# Altium PCB FlightController_Top_6x6.PcbDoc (part 5 of 6)
Units mm, origin at the board's own origin, x right, y up, seen from the top; angles counter-clockwise.
Board outline 149.8 x 149.8 mm, 2 copper layers (Top Layer, Bottom Layer); 156 components, 166 nets, 860 pads, 423 vias.
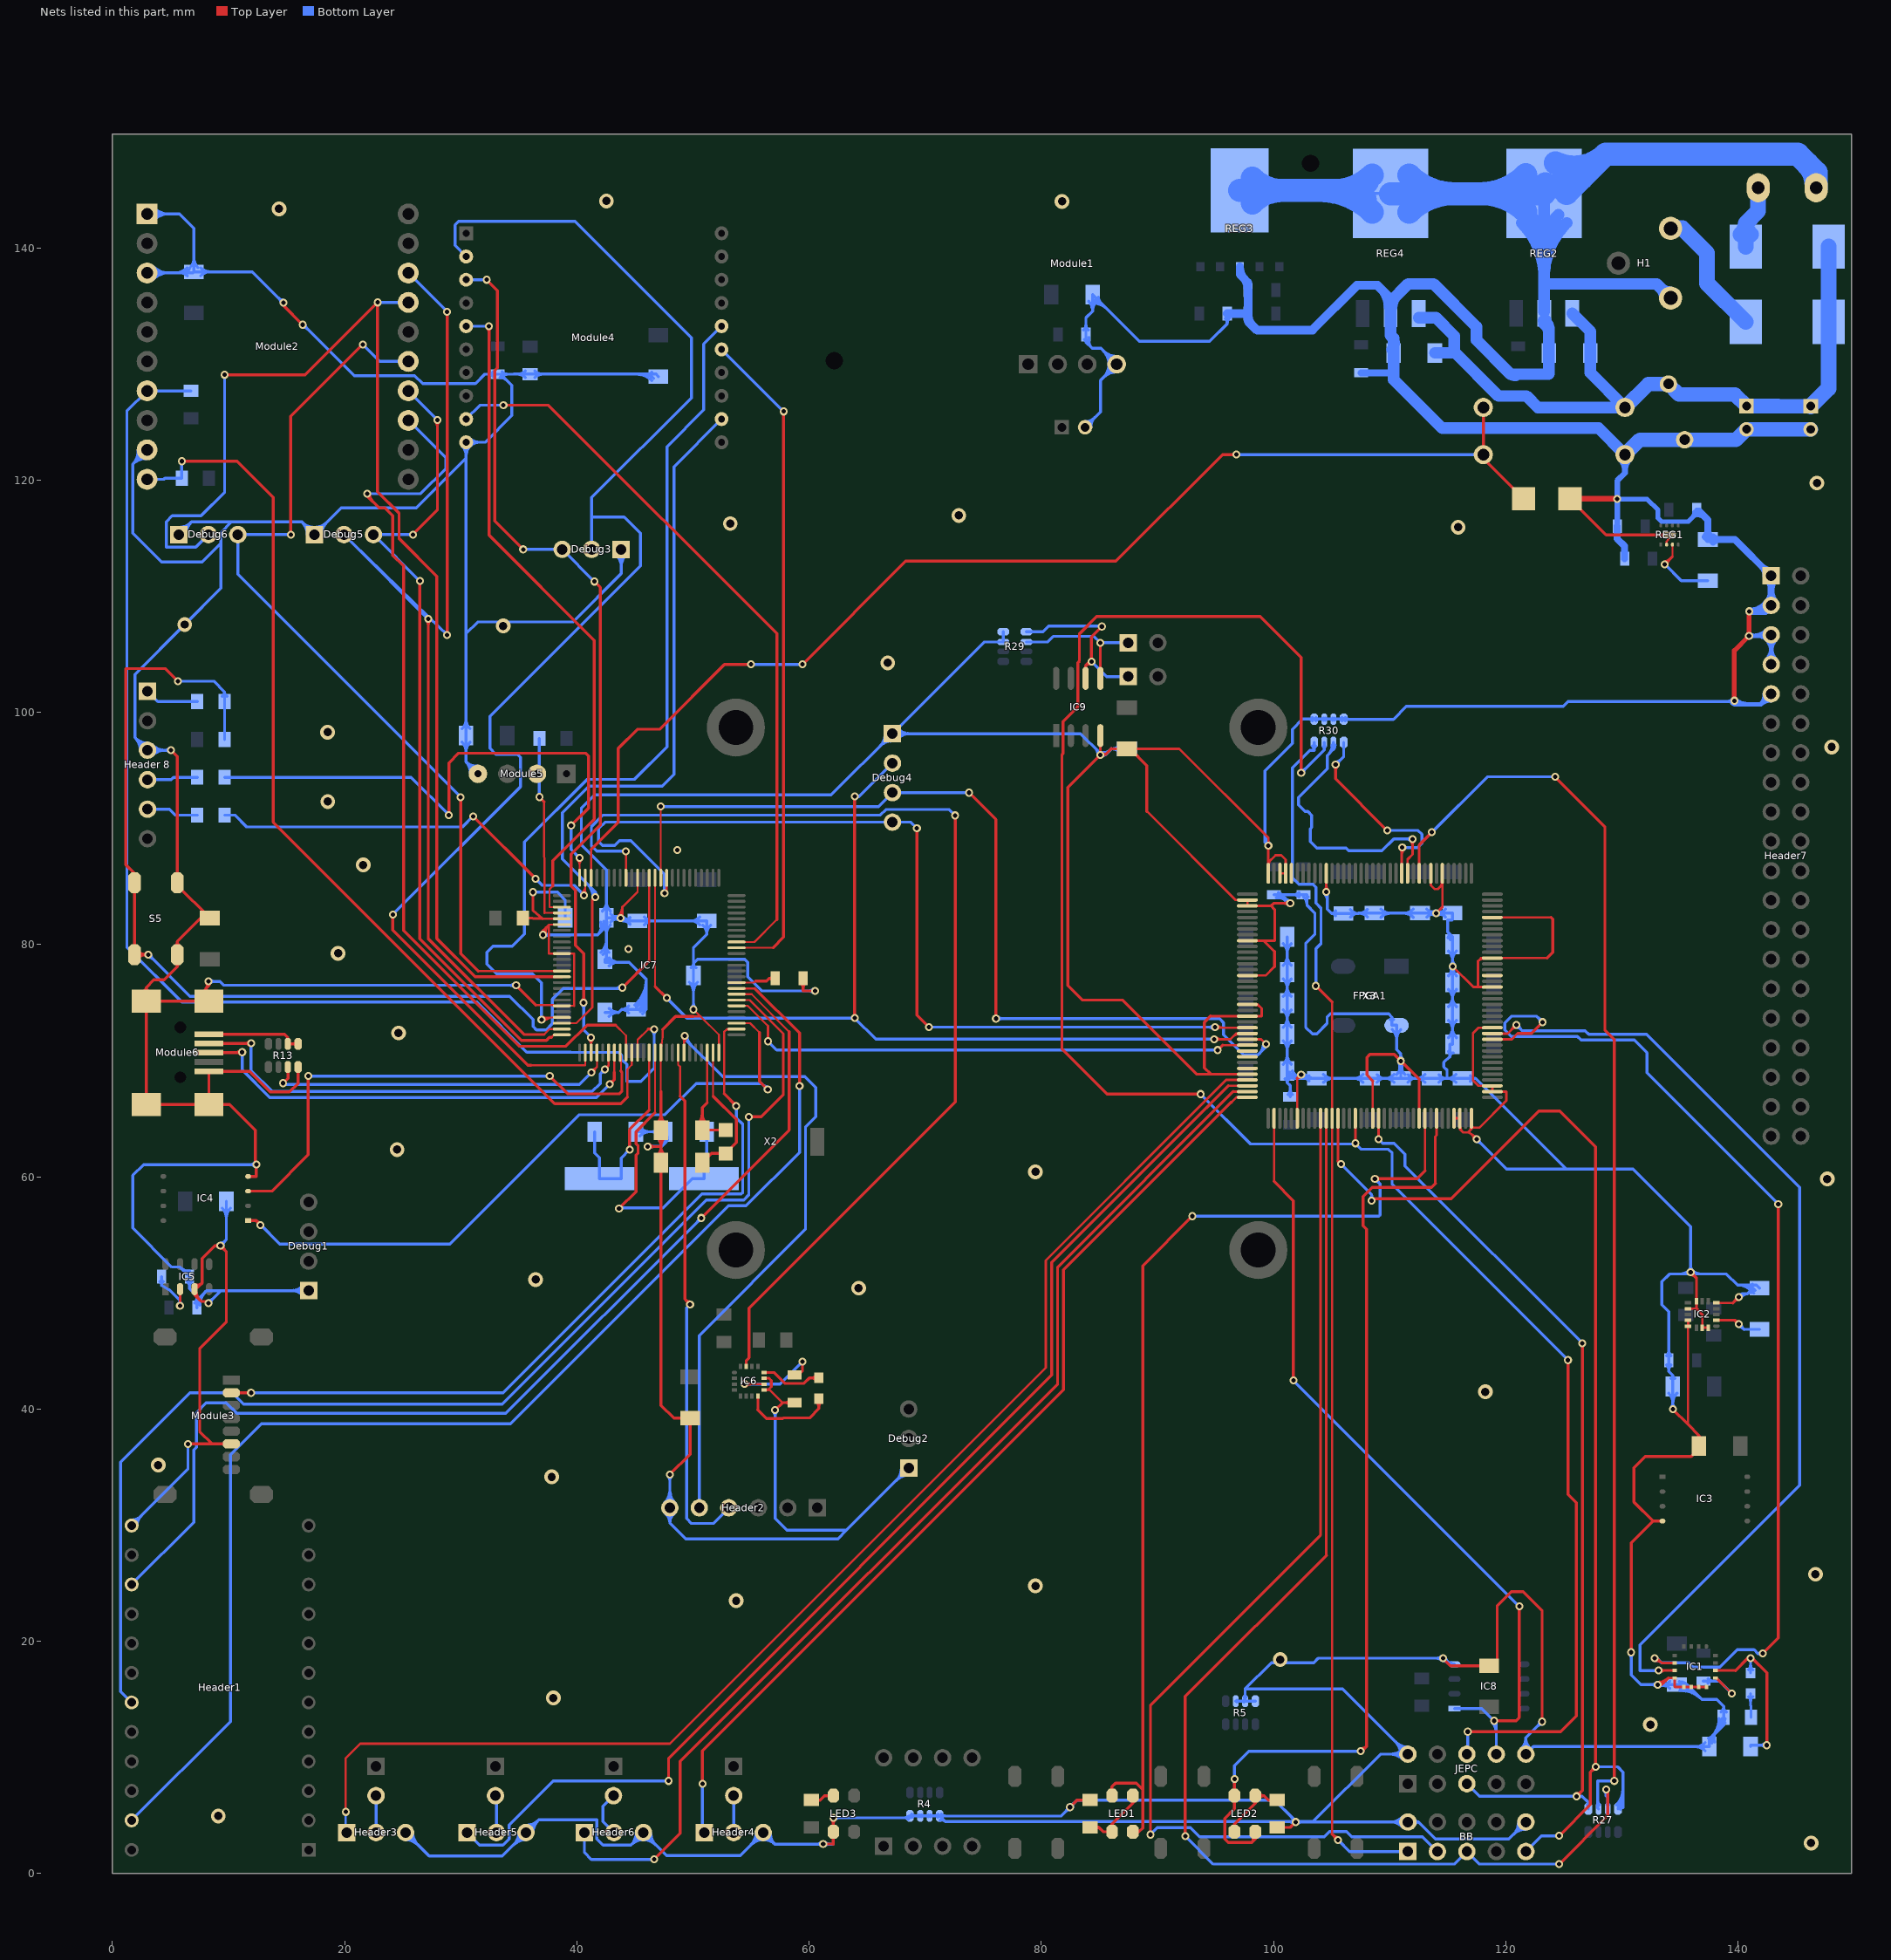
[diagram p5: the nets of this part, all layers, seen from the top]

## Via types
v1: diameter 0.686, hole 0.381, Top Layer to Bottom Layer, 391 vias
v2: diameter 1.27, hole 0.711, Top Layer to Bottom Layer, 32 vias

## Nets (pads, with @x,y where several pads share a name; then routed paths per layer and width w, separated by ;. In a path a pad name is that pad's centre, name@x,y a point inside that pad or via, vN(x,y) a via of type N, cw(c..) or ccw(c..) an arc to the next point about the centre after c; other vN are vias at no path point) (continued)
GND: (continued)
  Bottom Layer w0.4: v1(129.61,118.394) 129.61,118.364 132.198,118.364 133.117,117.445 133.117,116.745 133.432,116.429 135.733,116.429 C44.2@136.652,117.348 ; v1@129.711,118.495 ccw(c130.028,118.812) 130.028,118.364 ; 136.053,116.749 ccw(c135.565,117.237) C44.2@136.255,117.237 ; C44.2@136.455,117.221 C44.2@136.455,117.437 ; C40.1@137.414,114.894 C40.1@137.414,115.443 ; v1@139.514,100.829 ccw(c139.842,101.158) 139.842,100.694 ; v1@139.725,100.94 139.971,100.694 141.969,100.694 ; v1@139.797,101.112 ccw(c140.807,102.123) 140.807,100.694 ; v1(140.965,106.599) Header7.5@142.794,106.599 ; v1@141.067,106.498 cw(c141.311,106.254) 141.311,106.599 cw(c141.311,106.944) v1@141.067,106.7 ; 141.352,106.599 ccw(c141.352,108.203) Header7.5@142.486,107.069 ; 141.742,106.599 cw(c141.742,105.547) 142.486,106.291 cw(c141.547,105.352) 142.875,105.352 cw(c144.203,105.352) Header7.5@143.264,106.291 ; Header7.9@142.325,101.586 cw(c141.107,101.555) 141.969,100.694 ; Header7.7@142.486,104.529 ccw(c141.547,105.468) 142.875,105.468 ccw(c144.203,105.468) Header7.7@143.264,104.529 ; Header7.9@142.861,101.05 ccw(c142.83,99.832) 141.969,100.694 ; Header7.9@142.875,101.6 141.969,100.694 ; Header7.7@142.875,104.14 Header7.5@142.875,106.68
  Bottom Layer w0.5: C42.2@129.61,116.04 v1@129.61,118.364 ; v1(129.61,118.394) 129.61,119.958 130.276,120.624 R20.1@130.276,122.204 ; R20.1@129.869,121.797 cw(c128.888,120.816) 130.276,120.816 cw(c131.664,120.816) R20.1@130.683,121.797
  Bottom Layer w0.6: C47.2@107.549,129.259 110.346,129.259 ; C42.2@129.61,116.04 129.61,114.956 130.245,114.321 C39.2@130.245,113.246 ; C44.2@136.455,117.137 cw(c136.455,116.152) 137.152,116.848 ; C44.2@136.652,117.348 137.414,116.586 C40.1@137.414,115.443 ; C40.1@137.184,115.124 ccw(c136.629,115.679) 137.414,115.679 ccw(c138.199,115.679) C40.1@137.644,115.124 ; C40.1@137.414,114.894 139.741,114.894 Header7.1@142.875,111.76 Header7.3@142.875,109.22 142.367,108.712 v1(140.97,108.712) ccw(c140.97,110.635) Header7.3@142.514,109.488 ; C40.1@137.869,114.664 cw(c138.424,114.109) 138.424,114.894 cw(c138.424,115.679) C40.1@137.869,115.124 ; 142.163,108.712 ccw(c142.163,109.749) Header7.3@142.995,109.131 ; Header7.1@142.425,111.76 ccw(c141.339,111.76) 142.107,112.528 ccw(c142.875,113.296) Header7.1@142.875,112.21 ; Header7.3@142.557,109.538 ccw(c141.789,110.306) 142.875,110.306 ccw(c143.961,110.306) Header7.3@143.193,109.538 ; Header7.1@142.557,111.442 cw(c141.789,110.674) 142.875,110.674 cw(c143.961,110.674) Header7.1@143.193,111.442
  Bottom Layer w0.7: REG3.3@97.104,138.35 ccw(c98.593,138.35) 97.54,137.297 ; REG3.3@97.104,138.4 97.104,137.733 97.809,137.028 C45.2@97.809,136.368 ; 97.398,137.439 cw(c96.527,136.568) C45.2@97.759,136.568
  Bottom Layer w0.75: C46.2@96.018,134.336 C48.2@97.809,134.336 ; C45.2@97.809,136.368 C48.2@97.809,134.336 ; C48.2@97.834,134.136 ccw(c98.945,134.136) 98.159,133.351 ; 103.35,132.941 107.188,136.779 108.966,136.779 110.089,135.656 ; 103.378,132.914 98.596,132.914 97.809,133.701 C48.2@97.809,134.336 ; 109.182,136.563 cw(c107.525,134.905) REG4.2@109.869,134.905
  Bottom Layer w1: 110.089,135.656 REG4.2@110.089,135.392 ; REG4.2@110.184,134.905 cw(c111.589,134.905) 110.596,135.899 ; C49.1@110.239,131.256 ccw(c109.381,131.773) 110.089,132.481 ; 120.284,129.271 ccw(c120.861,129.848) C41.2@120.861,129.032 ; REG2.2@121.372,142.162 cw(c116.676,137.465) 123.317,137.465 cw(c129.959,137.465) REG2.2@125.262,142.162 ; REG2.2@122.079,142.869 cw(c119.09,139.88) 123.317,139.88 cw(c127.544,139.88) REG2.2@124.555,142.869 ; REG2.2@123.25,133.744 cw(c122.088,132.582) 123.731,132.582 ; REG2.2@123.272,133.727 cw(c122.854,132.956) 123.731,132.956 ; REG2.2@123.317,133.477 123.731,133.063 C43.2@123.731,130.967 123.731,129.165 ; REG2.2@123.317,134.514 REG2.2@123.317,144.674 ; REG2.2@123.412,133.811 ccw(c124.448,133.811) 123.715,133.079 ; 123.698,129.132 C41.2@121.061,129.132 120.423,129.132 117.475,132.08 117.475,133.223 113.792,136.906 111.603,136.906 REG4.2@110.089,135.392 ; 123.825,136.906 132.994,136.906 H1.OUT@134.209,135.691 ; R20.1@130.276,122.204 127.999,124.481 114.533,124.481 110.346,128.668 110.346,129.259 C49.1@110.346,130.967 110.346,132.224 110.089,132.481 ; H1.OUT@133.709,135.691 ccw(c132.502,135.691) 133.355,136.545 ccw(c134.209,137.398) H1.OUT@134.209,136.191 ; 110.089,132.481 REG4.2@110.089,134.35 REG4.2@110.089,135.392
  Bottom Layer w1.25: R20.1@130.276,122.204 131.559,123.487 C38.1@135.417,123.487 139.845,123.487 C36.2@140.744,124.386 143.48,124.386 ; 143.487,124.379 C37.2@146.274,124.379
  Bottom Layer w2: REG3.3@97.104,144.953 106.817,144.953 ; REG3.3@98.165,143.894 cw(c100.721,141.338) 100.721,144.953 ; REG3.3@98.165,146.016 ccw(c100.73,148.581) 100.73,144.953 ; 104.014,144.953 cw(c104.014,138.613) REG4.2@108.497,143.096 ; 105.295,144.953 ccw(c105.295,149.482) REG4.2@108.497,146.28 ; REG4.2@107.914,144.11 ccw(c106.817,143.818) 106.817,144.953 ; REG4.2@108.092,145.727 cw(c106.817,146.391) 106.817,144.953 ; REG4.2@110.089,144.674 REG2.2@123.317,144.674 ; REG4.2@111.681,143.096 cw(c115.489,139.288) 115.489,144.674 ; REG4.2@111.681,146.28 ccw(c115.558,150.157) 115.558,144.674 ; 117.81,144.674 ccw(c117.81,150.211) REG2.2@121.725,146.296 ; 117.955,144.674 cw(c117.955,139.342) REG2.2@121.725,143.112 ; REG2.2@123.425,145.528 ccw(c124.631,148.064) 126.617,146.078 ; REG2.2@124.284,147.334 ccw(c125.922,150.78) 128.621,148.082 ; REG2.2@125.243,144.704 128.621,148.082 ; 145.999,147.235 cw(c144.205,145.441) Header9.R@146.742,145.441 ; Header9.R@146.742,145.191 146.742,146.492 145.152,148.082 128.621,148.082
  other v1: 44.45,79.629 48.641,88.138
  other v2: 146.304,2.629 9.113,4.953 132.46,12.827 37.973,15.113 100.584,18.415 53.721,23.495 79.502,24.765 146.685,25.774 37.831,34.163 3.937,35.179 118.245,41.485 64.262,50.419 36.449,51.157 147.701,59.817 79.502,60.43 24.511,62.357 24.638,72.39 19.431,79.248 21.59,86.868 18.542,92.329 148.082,97.028 18.527,98.298 66.777,104.267 33.655,107.442 115.904,115.951 53.213,116.267 72.898,116.967 146.812,119.761 14.351,143.383 81.788,144.018 42.545,144.056
GPS_PPS: IC7.59 Module2.13 | length 79.1
  Top Layer w0.17: IC7.59@44.229,70.707 44.229,72.17
  Top Layer w0.175: 43.322,73.077 44.229,72.17
  Top Layer w0.254: v1(21.941,118.842) 21.941,118.639 22.957,117.623 23.465,117.623 24.151,116.937 24.151,113.533 25.065,112.619 25.065,81.202 35.02,71.247 39.065,71.247 40.895,73.077 43.322,73.077 ; v1@22.157,118.842 ccw(c23.169,118.842) 22.453,118.126
  Bottom Layer w0.254: v1(21.941,118.842) 26.551,118.842 28.71,121.001 28.71,121.926 Module2.13@25.481,125.155
GPS_RXA: Debug6.3 IC7.39 Module2.15 | length 81.4
  Top Layer w0.17: 31.489,77.731 IC7.39@38.704,77.731
  Top Layer w0.254: v1(15.362,115.316) 15.362,125.497 v1(21.56,131.694) ; v1(29.993,92.705) 29.993,79.227 31.489,77.731
  Bottom Layer w0.254: v1(15.362,115.316) Debug6.3@10.795,115.316 10.795,111.903 v1(29.993,92.705) ; v1(21.56,131.694) 23.019,130.235 Module2.15@25.481,130.235
GPS_RXB: Debug5.3 IC7.50 Module2.14 | length 71.2
  Top Layer w0.17: 37.804,72.017 38.019,72.231 IC7.50@38.704,72.231 ; 37.926,72.138 cw(c38.054,72.009) IC7.50@38.054,72.191
  Top Layer w0.254: v1(25.883,115.316) 27.986,117.42 v1(27.986,125.19) ; v1(26.475,111.32) 26.475,80.511 35.231,71.755 37.379,71.755 37.641,72.017 37.804,72.017 ; v1@27.833,125.037 cw(c27.465,124.668) 27.986,124.668 cw(c28.508,124.668) v1@28.139,125.037
  Bottom Layer w0.254: Module2.14@25.481,127.695 v1(27.986,125.19) ; v1(25.883,115.316) Debug5.3@22.479,115.316 v1(26.475,111.32)
GPS_TXA: Debug6.2 IC7.40 Module2.17 | length 120.1
  Top Layer w0.254: v1(9.647,129.078) 16.593,129.078 v1(22.83,135.315) 22.83,119.005 24.684,117.151 24.684,114.981 27.935,111.73 27.935,80.523 31.235,77.223 32.837,77.223 32.845,77.232 IC7.40@38.704,77.232
  Bottom Layer w0.254: Debug6.2@8.255,115.316 7.178,114.239 4.638,114.239 4.638,116.429 5.146,116.937 7.628,116.937 9.66,118.969 ; v1(22.83,135.315) Module2.17@25.481,135.315 ; 9.66,118.969 9.66,129.116 9.66,118.969
GPS_TXB: Debug5.2 IC7.49 Module2.18 | length 99.8
  Top Layer w0.17: 37.637,72.732 IC7.49@38.704,72.732
  Top Layer w0.175: 37.168,72.263 37.637,72.732
  Top Layer w0.254: v1@27.046,107.903 cw(c26.677,107.535) 27.199,107.535 cw(c27.72,107.535) v1@27.352,107.903 ; v1(27.199,108.056) 27.199,80.506 35.441,72.263 37.168,72.263 ; v1(28.824,106.675) v1(28.824,134.512)
  Bottom Layer w0.254: Debug5.2@19.939,115.316 20.65,114.605 ; Module2.18@25.481,137.855 v1(28.824,134.512) ; v1(27.199,108.056) 20.65,114.605 ; 20.65,114.605 v1@27.297,108.157 ; v1@27.297,108.157 v1(28.824,106.675) v1@27.297,108.157
GPS_XRST: IC7.61 Module2.7 R8.2 | length 111.2
  Top Layer w0.17: IC7.61@45.229,70.707 45.229,71.798
  Top Layer w0.175: 45.229,71.798 46.147,72.716
  Top Layer w0.254: 46.147,72.716 v1(46.655,72.716)
  Bottom Layer w0.254: R8.2@6.761,127.697 4.849,127.697 4.847,127.695 Module2.7@2.981,127.695 1.24,125.954 1.24,79.786 5.975,75.051 31.375,75.051 35.687,70.739 39.462,70.739 39.479,70.722 43.607,70.722 43.874,70.455 43.874,70.112 44.305,69.681 44.305,68.232 45.525,68.232 46.655,69.363 v1(46.655,72.716) ; v1@46.502,72.563 cw(c46.134,72.194) 46.655,72.194 cw(c47.177,72.194) v1@46.808,72.563
GPS_XSTBY: IC7.60 Module2.10 R9.2 | length 86.4
  Top Layer w0.17: 44.729,69.641 IC7.60@44.729,70.707
  Top Layer w0.175: 44.345,66.862 44.345,69.256 44.729,69.641
  Top Layer w0.254: v1(5.967,121.636) 10.74,121.636 13.843,118.533 13.843,90.551 38.092,66.302 43.785,66.302 44.345,66.862
  Bottom Layer w0.254: Module2.10@2.981,120.075 4.415,120.075 4.512,120.172 R9.2@5.967,120.172 v1(5.967,121.636)
GYRO_DRDY: FPGA1.47 IC1.6 | length 94.5
  Top Layer w0.21: FPGA1.47@118.852,71.844 120.526,71.844 121.041,72.359 ; v1(132.842,18.542) 133.036,18.542 133.445,18.133 ; v1@132.847,18.514 cw(c132.911,18.165) 133.162,18.416 ; v1@132.885,18.308 cw(c132.998,17.686) 133.445,18.133 ; IC1.6@134.562,18.133 133.445,18.133
  Top Layer w0.254: 121.041,72.359 122.219,72.359 v1(123.185,73.325) ; v1(142.134,18.944) 143.48,20.29 v1(143.48,57.653)
  Bottom Layer w0.254: v1@122.969,73.325 ccw(c122.448,73.325) 122.817,73.694 ccw(c123.185,74.063) v1@123.185,73.541 ; v1(123.185,73.325) 122.677,73.833 120.493,73.833 119.919,73.259 119.919,72.655 120.493,72.081 126.183,72.081 126.486,71.777 131.084,71.777 132.177,70.684 132.177,68.956 v1(143.48,57.653) ; v1(132.842,18.542) 133.043,18.542 133.424,18.161 ; v1@132.881,18.33 cw(c132.993,17.729) 133.424,18.161 ; v1@141.957,18.82 ccw(c141.719,18.654) 141.719,18.944 ; v1@141.957,19.068 cw(c141.719,19.234) 141.719,18.944 ; v1(142.134,18.944) 141.719,18.944 ; 133.424,18.161 135.763,18.161 136.144,17.78 138.455,17.78 139.941,19.266 141.397,19.266 141.719,18.944
GYRO_INT1: FPGA1.48 IC1.7 | length 85.5
  Top Layer w0.21: FPGA1.48@118.852,72.344 120.172,72.344 v1(120.925,73.097) ; v1@120.687,73.097 cw(c120.112,73.097) 120.518,72.69 cw(c120.925,72.284) v1@120.925,72.859 ; v1(133.168,17.483) IC1.7@134.562,17.483 ; v1@133.336,17.315 cw(c133.742,16.908) 133.742,17.483 cw(c133.742,18.058) v1@133.336,17.651
  Bottom Layer w0.254: v1@120.925,72.881 cw(c120.925,72.359) 121.293,72.728 cw(c121.662,73.097) v1@121.141,73.097 ; v1(120.925,73.097) 121.433,72.589 126.855,72.589 127.159,72.285 132.139,72.285 145.334,59.089 145.334,33.439 131.572,19.677 131.572,17.483 v1(133.168,17.483)
HUMIDITY_I/O: IC7.29 Module5.2 R10.1 | length 16.9
  Top Layer w0.17: 37.206,82.731 IC7.29@38.704,82.731
  Top Layer w0.175: 37.181,92.299 37.206,82.731
  Top Layer w0.254: v1(36.768,92.712) 37.181,92.299
  Bottom Layer w0.254: v1(36.768,92.712) 36.768,94.5 Module5.2@36.556,94.712 36.768,94.924 R10.1@36.768,97.76
IC9_10K_C: IC9.5 J5.1 R29.6 | length 12.3
  Top Layer w0.254: IC9.5@85.09,102.934 v1(85.09,106.005)
  Bottom Layer w0.254: R29.6@78.724,106.064 80.537,106.064 81.026,106.553 84.542,106.553 v1(85.09,106.005) J5.1@87.503,106.005
IC9_10K_D: IC9.6 J6.1 R29.5 | length 16.1
  Top Layer w0.254: IC9.6@83.82,102.934 83.82,104.038 ; v1@84.281,104.178 ccw(c84.18,103.678) 83.82,104.038 ; v1(85.217,107.402) 84.323,106.508 v1(84.323,104.389) 84.171,104.389 83.82,104.038
  Bottom Layer w0.254: R29.5@78.724,106.939 80.142,106.939 80.645,107.442 v1@85.217,107.442 ; v1(84.323,104.389) 85.629,103.084 J6.1@87.503,103.084
ICSP_MCLR: "Header 8.1" R18.2 | length 4.7
  Bottom Layer w0.254: 3.018,101.824 3.907,100.935 R18.2@7.304,100.935
ICSP_PGC: IC7.24 R15.2 | length 37.6
  Top Layer w0.17: v1@40.428,84.43 ccw(c39.699,85.158) IC7.24@40.729,85.158 ; v1@40.548,84.309 ccw(c40.109,84.748) 40.729,84.748 ; v1@40.729,84.367 IC7.24@40.729,85.756 ; 40.729,84.582 ccw(c40.945,84.582) v1@40.792,84.43
  Top Layer w0.175: v1(40.61,84.247) v1@40.729,84.367
  Top Layer w0.254: v1(31.06,91.054) v1(36.444,85.67)
  Bottom Layer w0.254: R15.2@9.654,91.156 10.536,91.156 11.552,90.14 30.145,90.14 v1(31.06,91.054) ; v1(36.444,85.67) 37.008,85.106 39.752,85.106 v1(40.61,84.247)
ICSP_PGD: IC7.25 R14.2 | length 50
  Top Layer w0.17: v1@40.047,87.291 cw(c39.606,86.85) 40.229,86.85 cw(c40.852,86.85) v1@40.412,87.291 ; IC7.25@40.229,85.756 v1(40.229,87.473)
  Top Layer w0.254: v1(28.977,91.156) 28.977,95.652 29.815,96.49 40.737,96.49 40.991,96.236 40.991,91.755 v1(39.503,90.267)
  Bottom Layer w0.254: R14.2@9.654,94.416 25.717,94.416 v1(28.977,91.156) ; v1(39.503,90.267) 39.503,88.199 v1(40.229,87.473)
MAGNET_DRDY: IC6.15 IC7.17 | length 94.2
  Top Layer w0.17: IC7.17@44.229,85.756 v1(44.229,88.044)
  Top Layer w0.21: IC6.15@54.589,43.675 54.589,44.175
  Top Layer w0.254: 54.589,44.175 54.834,44.42 54.834,48.696 72.589,66.451 v1(72.589,91.131)
  Bottom Layer w0.254: v1(44.229,88.044) 41.724,88.044 41.245,88.523 41.245,90.14 42.261,91.156 66.137,91.156 66.62,91.639 72.081,91.639 v1(72.589,91.131)
MCLR: IC7.13 R17.1 R18.1 S5.2 | length 101.6
  Top Layer w0.17: 46.229,78.609 IC7.13@46.229,85.756
  Top Layer w0.254: S5.2@2.187,78.845 cw(c2.909,78.123) 2.909,79.144 cw(c2.909,80.165) S5.2@2.187,79.443 ; v1@2.944,78.991 ccw(c2.575,78.623) 2.575,79.144 ccw(c2.575,79.666) v1@2.944,79.297 ; v1(3.096,79.144) S5.2@1.888,79.144 S5.2@1.888,85.344 1.888,86.123 1.138,86.873 1.138,103.78 4.542,103.78 v1(5.634,102.688) ; v1(43.918,76.297) 46.229,78.609
  Bottom Layer w0.254: v1@3.096,78.928 cw(c3.096,78.407) 3.465,78.775 cw(c3.834,79.144) v1@3.312,79.144 ; v1(3.096,79.144) 6.681,75.559 34.21,75.559 36.228,73.541 36.228,72.944 36.516,72.656 37.35,72.656 37.892,73.198 37.892,75.301 38.825,76.234 43.854,76.234 v1(43.918,76.297) ; v1(5.634,102.688) 8.733,102.688 9.654,101.767 ; R18.1@9.448,101.4 ccw(c9.226,101.767) 9.654,101.767 ; R17.1@9.654,97.675 R18.1@9.654,100.935 9.654,101.767 ; R18.1@9.86,101.4 cw(c10.082,101.767) 9.654,101.767 ; 43.243,76.234 ccw(c43.243,76.972) v1@43.765,76.45 ; 43.549,76.234 cw(c43.549,75.929) v1@43.765,76.144
MOTOR_W1: FPGA1.141 Header3.1 | length 113.8
  Top Layer w0.21: v1(20.087,5.304) 20.087,9.927 21.336,11.176 47.997,11.176 80.391,43.57 80.391,52.808 94.008,66.426 94.012,66.426 94.423,66.837 94.423,66.841 95.913,68.33 ; 95.913,68.344 FPGA1.141@97.752,68.344 FPGA1.141@97.716,68.308
  Bottom Layer w0.21: v1(20.087,5.304) 20.087,3.602 Header3.1@20.163,3.526
MOTOR_W2: FPGA1.142 Header5.1 | length 102.3
  Top Layer w0.21: 96.114,67.844 FPGA1.142@97.752,67.844
  Top Layer w0.254: v1(47.9,7.971) 47.9,9.927 80.899,42.926 80.899,52.629 94.21,65.94 94.213,65.94 94.909,66.636 94.909,66.639 96.114,67.844
  Bottom Layer w0.254: Header5.1@30.535,3.526 31.627,2.434 33.625,2.434 34.158,2.967 34.158,4.161 37.968,7.971 v1(47.9,7.971)
MOTOR_W3: FPGA1.143 Header6.1 | length 96
  Top Layer w0.21: 96.541,67.344 FPGA1.143@97.752,67.344
  Top Layer w0.254: v1(46.655,1.215) 48.895,3.454 48.895,9.652 81.407,42.164 81.407,52.21 96.541,67.344
  Bottom Layer w0.254: Header6.1@40.652,3.526 40.652,1.807 41.245,1.215 v1(46.655,1.215)
MOTOR_W4: FPGA1.144 Header4.1 | length 82.8
  Top Layer w0.2: 96.393,66.421 96.816,66.844 FPGA1.144@97.409,66.844
  Top Layer w0.254: v1(50.821,7.717) 50.821,10.562 81.915,41.656 81.915,52 96.336,66.421 96.393,66.421
  Bottom Layer w0.254: Header4.1@50.821,3.675 v1(50.821,7.717)
MSEL0: FPGA1.85 R30.1 | length 20.3
  Top Layer w0.21: v1@110.927,88.194 cw(c110.624,87.891) 111.052,87.891 ; FPGA1.85@111.052,86.144 v1@111.052,88.319 ; 111.052,87.683 cw(c111.774,87.683) v1@111.263,88.194
  Top Layer w0.254: v1@105.202,95.362 cw(c104.833,94.994) 105.355,94.994 cw(c105.876,94.994) v1@105.507,95.362 ; v1(105.355,95.515) 105.355,94.28 v1(109.8,89.835) ; v1@111.052,88.319 v1(111.095,88.362)
  Bottom Layer w0.254: v1(105.355,95.515) 106.05,96.211 R30.1@106.05,97.425 ; v1@105.355,95.731 ccw(c105.355,96.253) 105.723,95.884 ccw(c106.092,95.515) v1@105.571,95.515 ; v1(109.8,89.835) 112.467,89.835 112.797,89.505 112.797,88.743 112.416,88.362 v1(111.095,88.362)
MSEL1: FPGA1.84 R30.2 | length 26.6
  Top Layer w0.21: FPGA1.84@111.552,86.144 111.552,87.34 111.978,87.766 v1(111.978,89.099) ; v1@111.81,88.93 cw(c111.403,88.524) 111.978,88.524 cw(c112.553,88.524) v1@112.146,88.93
  Bottom Layer w0.254: 104.722,96.378 ccw(c103.925,97.175) R30.2@105.052,97.175 ; R30.2@105.088,97.088 cw(c104.878,96.878) 105.175,96.878 cw(c105.472,96.878) R30.2@105.262,97.088 ; 105.155,96.812 ccw(c104.792,97.175) R30.2@105.306,97.175 ; R30.2@105.175,97.425 105.175,96.831 104.631,96.287 104.631,95.156 102.154,92.68 102.154,92.02 102.713,91.461 102.967,91.461 103.297,91.131 103.297,90.102 103.17,89.975 103.17,88.87 103.729,88.311 106.244,88.311 106.472,88.083 109.35,88.083 110.366,89.099 v1(111.978,89.099) ; v1@111.825,88.946 ccw(c111.456,88.577) 111.456,89.099 ccw(c111.456,89.62) v1@111.825,89.251
NCE: FPGA1.16 JEPC.6 R30.3 | length 182.6
  Top Layer w0.21: v1(107.052,62.89) 107.052,63.703 ; FPGA1.16@107.052,65.044 107.052,63.703 ; 107.056,63.699 107.052,63.703
  Top Layer w0.254: v1(93.721,67.128) 85.67,67.128 81.783,71.014 81.783,96.376 81.885,96.477 81.885,99.208 83.155,100.478 83.155,104.288 83.282,104.415 83.282,106.777 84.781,108.276 98.852,108.276 102.383,104.745 v1(102.383,94.79) ; v1(116.734,12.213) 124.735,12.213 126.094,13.572 126.094,31.936 125.37,32.66 v1(125.37,44.217)
  Bottom Layer w0.254: v1(93.721,67.128) 98.017,62.832 ; v1(102.383,94.79) 104.375,96.782 R30.3@104.375,97.425 ; v1@102.383,95.006 ccw(c102.383,95.527) 102.752,95.159 ccw(c103.12,94.79) v1@102.599,94.79 ; R30.3@104.288,97.088 cw(c104.078,96.878) 104.375,96.878 cw(c104.672,96.878) R30.3@104.462,97.088 ; v1(107.052,62.89) 107.564,62.378 109.914,62.378 110.219,62.073 110.219,59.368 v1(125.37,44.217) ; JEPC.6@116.659,10.274 116.734,10.35 v1(116.734,12.213) ; 98.017,62.832 107.052,62.832 98.017,62.832
NCONFIG: FPGA1.20 JEPC.5 R27.1 | length 80.2
  Top Layer w0.21: v1(109.052,63.233) FPGA1.20@109.052,65.044
  Top Layer w0.254: v1(126.106,6.65) 126.602,7.146 v1(126.602,45.669) ; v1@126.106,6.866 ccw(c126.106,7.388) 126.475,7.019 ccw(c126.844,6.65) v1@126.322,6.65
  Bottom Layer w0.254: v1(109.052,63.233) 109.392,62.892 110.391,62.892 111.328,61.955 111.328,60.943 v1(126.602,45.669) ; JEPC.5@116.659,7.734 117.743,6.65 v1(126.106,6.65) 126.589,6.65 ; v1@126.267,6.506 cw(c126.589,6.219) 126.589,6.65 ; v1@126.267,6.794 ccw(c126.589,7.081) 126.589,6.65 ; R27.1@127.012,5.912 ccw(c126.875,6.117) 127.122,6.117 ; R27.1@127.122,5.572 127.122,6.117 ; R27.1@127.232,5.912 cw(c127.369,6.117) 127.122,6.117 ; 126.589,6.65 127.122,6.117
NCSO: FPGA1.2 IC8.1 JEPC.8 | length 70.9
  Top Layer w0.21: 100.052,59.609 FPGA1.2@100.052,65.044
  Top Layer w0.254: 100.052,59.609 101.722,57.939 v1(101.722,42.464) ; v1(118.994,13.153) 120.899,13.153 121.179,13.432 v1(121.179,23.008)
  Bottom Layer w0.254: v1(101.722,42.464) v1(121.179,23.008) ; IC8.1@115.589,14.211 117.936,14.211 v1(118.994,13.153) 119.199,12.948 JEPC.8@119.199,10.274 ; v1@118.842,13 cw(c117.98,12.138) 119.199,12.138 ; v1@119.021,13.179 cw(c118.593,12.751) 119.199,12.751
NetC1_2: C1.2 IC1.13 | length 5.9
  Top Layer w0.21: IC1.13@138.062,16.833 138.149,16.833 v1(139.492,15.489)
  Bottom Layer w0.254: C1.2@137.033,16.58 138.402,16.58 v1(139.492,15.489) ; C1.2@137.426,16.387 cw(c137.892,15.921) 137.892,16.58 cw(c137.892,17.239) C1.2@137.426,16.773
NetC5_2: C5.2 IC2.2 | length 5.6
  Top Layer w0.21: IC2.2@138.153,47.644 139.748,47.644
  Top Layer w0.254: v1@139.866,47.327 ccw(c139.461,47.357) 139.748,47.644 ; v1@140.065,47.526 cw(c140.035,47.931) 139.748,47.644 ; v1(140.081,47.311) 139.748,47.644
  Bottom Layer w0.254: v1@140.081,47.095 cw(c140.081,46.574) 140.45,46.942 cw(c140.818,47.311) v1@140.297,47.311 ; v1(140.081,47.311) 140.534,46.858 140.541,46.866 C5.2@141.859,46.866
NetC6_1: C6.1 C7.1 IC1.14 | length 18.5
  Top Layer w0.21: IC1.14@138.062,17.483 139.797,17.483
  Top Layer w0.254: 139.797,17.483 140.856,18.542 141.224,18.542 142.494,17.272 v1(142.494,11.049)
  Bottom Layer w0.254: C6.1@140.904,17.526 ccw(c140.438,17.992) 141.097,17.992 ccw(c141.756,17.992) C6.1@141.29,17.526 ; C7.1@141.094,10.922 C7.1@141.094,11.049 ; C6.1@141.097,17.283 141.097,18.203 141.092,18.207 141.097,18.212 v1(141.097,18.542) ; C7.1@141.094,11.049 v1(142.494,11.049) C7.1@141.094,11.049 ; 141.973,11.049 ccw(c141.973,11.57) 142.341,11.202 cw(c141.973,11.57) 141.973,11.049 ; 141.973,11.049 cw(c141.973,10.528) 142.341,10.896 ccw(c141.973,10.528) 141.973,11.049
NetC6_2: C6.2 R3.1 | length 3.1
  Bottom Layer w0.254: C6.2@140.904,15.24 cw(c140.438,14.774) 141.097,14.774 cw(c141.756,14.774) C6.2@141.29,15.24 ; C6.2@141.097,15.483 141.097,14.48 141.129,14.448 R3.1@141.129,13.462
NetC16_1: C16.1 IC5.2 | length 6.2
  Top Layer w0.254: v1(5.812,48.89) 5.822,48.9 IC5.2@5.822,50.33
  Bottom Layer w0.254: C16.1@4.062,50.99 cw(c3.789,50.643) 4.231,50.643 ; C16.1@4.231,51.405 4.231,50.643 ; C16.1@4.4,50.99 ccw(c4.673,50.643) 4.231,50.643 ; v1@5.672,49.054 ccw(c5.413,49.358) 5.812,49.358 ; v1(5.812,48.89) 5.812,49.358 ; v1@5.952,49.054 cw(c6.211,49.358) 5.812,49.358 ; 4.231,50.643 4.908,50.262 5.812,49.358
NetC20_1: C20.1 IC6.10 | length 12.6
  Top Layer w0.21: v1@54.437,42.15 IC6.10@56.114,42.15 v1@54.437,42.15 ; v1@54.605,41.991 cw(c54.989,41.608) 54.989,42.15 ccw(c54.989,41.608) v1@54.605,41.991 ; v1@54.605,42.328 ccw(c55.034,42.757) 55.034,42.15 cw(c55.034,42.757) v1@54.605,42.328
  Top Layer w0.254: v1@54.437,42.15 v1(54.437,42.159) ; C20.1@58.771,42.953 59.082,42.953 59.431,43.302 v1(59.431,44.09)
  Bottom Layer w0.254: v1(54.437,42.159) 57.501,42.159 v1(59.431,44.09)
NetC22_1: C22.1 IC6.12 | length 6.3
  Top Layer w0.21: IC6.12@56.114,43.15 56.968,43.15
  Top Layer w0.254: 56.968,43.15 57.907,42.21 59.558,42.21 60.031,42.683 C22.1@60.833,42.683 ; C22.1@60.64,42.49 ccw(c60.174,42.024) 60.174,42.683 ccw(c60.174,43.342) C22.1@60.64,42.876
NetC22_2: C22.2 IC6.8 | length 9
  Top Layer w0.21: 55.589,39.938 IC6.8@55.589,41.125
  Top Layer w0.254: 55.589,39.938 56.333,39.194 57.736,39.194 57.78,39.238 60.041,39.238 60.833,40.03 C22.2@60.833,40.883 ; C22.2@60.64,40.64 cw(c60.174,40.174) 60.833,40.174 cw(c61.492,40.174) C22.2@61.026,40.64
NetC30_1: C30.1 IC7.85 | length 4.3
  Top Layer w0.17: IC7.85@53.754,76.731 55.24,76.731
  Top Layer w0.175: 55.24,76.731 55.377,76.868
  Top Layer w0.254: 55.377,76.868 56.32,76.868 56.54,77.089 ; C30.1@56.878,76.922 ccw(c56.54,76.662) 56.54,77.089 ; C30.1@56.878,77.255 cw(c56.54,77.515) 56.54,77.089 ; C30.1@57.094,77.089 56.54,77.089
NetC31_1: C31.1 IC7.30 R16.1 | length 10.7
  Top Layer w0.17: 37.042,82.232 IC7.30@38.704,82.232
  Top Layer w0.254: R16.1@35.339,82.296 37.042,82.232 36.216,82.943 v1(36.216,84.522)
  Bottom Layer w0.254: v1(36.216,84.522) 38.328,84.522 38.993,83.858 C31.1@38.993,82.296
NetC40_2: C40.2 REG1.3 | length 7.1
  Top Layer w0.17: 134.362,113.427 REG1.3@134.362,114.453
  Top Layer w0.254: v1(133.701,112.766) 134.362,113.427 ; v1@133.701,112.982 ccw(c133.701,113.503) 134.07,113.134 ccw(c134.438,112.766) v1@133.917,112.766
  Bottom Layer w0.254: v1(133.701,112.766) 135.123,111.344 C40.2@137.414,111.344
NetD1_0: D1.A Header9.L | length 7.7
  Bottom Layer w1.37: D1.A@140.226,141.173 ccw(c139.472,142.108) 140.674,142.108 ; D1.A@140.674,140.111 140.674,142.108 ; D1.A@141.121,141.173 cw(c141.875,142.108) 140.674,142.108 ; Header9.L@141.742,145.191 141.742,143.177 140.674,142.108
NetD3_0: D3.A H1.IN | length 11.3
  Bottom Layer w1.37: H1.IN@134.209,141.691 135.224,141.691 137.344,139.57 137.344,136.963 D3.A@140.674,133.634
NetHeader3_2: Header3.2 J1.2 | length 3.2
  Bottom Layer w0.254: Header3.2@22.703,3.526 J1.2@22.703,6.701
NetHeader4_2: Header4.2 J3.2 | length 3.2
  Bottom Layer w0.254: Header4.2@53.509,3.526 J3.2@53.509,6.701
NetHeader5_2: Header5.2 J2.2 | length 3.2
  Bottom Layer w0.254: J2.2@32.99,6.701 33.075,6.616 Header5.2@33.075,3.526
NetHeader6_2: Header6.2 J4.2 | length 3.9
  Bottom Layer w0.254: J4.2@43.15,6.701 42.237,5.788 42.237,4.481 Header6.2@43.192,3.526
"NetHeader 8_4": "Header 8.4" R14.1 | length 4.4
  Bottom Layer w0.254: 3.018,94.204 5.05,94.204 5.262,94.416 R14.1@7.304,94.416
"NetHeader 8_5": "Header 8.5" R15.1 | length 4.5
  Bottom Layer w0.254: 3.018,91.664 4.898,91.664 5.406,91.156 R15.1@7.304,91.156
NetLED1_2: LED1.1 LED1.4 R6.1 | length 7.6
  Top Layer w0.254: R6.1@84.201,3.969 84.958,3.969 ; R6.1@84.685,3.796 cw(c84.958,3.665) 84.958,3.969 ; R6.1@84.685,4.141 ccw(c84.958,4.272) 84.958,3.969 ; LED1.1@85.961,4.042 ccw(c85.885,4.237) 86.095,4.237 ; LED1.1@86.229,4.042 cw(c86.305,4.237) 86.095,4.237 ; LED1.4@87.753,6.248 cw(c87.667,6.037) 87.895,6.037 ; LED1.4@87.895,6.694 87.895,6.037 ; LED1.4@88.037,6.248 ccw(c88.123,6.037) 87.895,6.037 ; 84.958,3.969 85.333,3.594 LED1.1@86.095,3.594 86.095,4.237 ; 86.095,4.237 87.895,6.037
NetLED2_2: LED2.1 LED2.4 R7.1 | length 8.7
  Top Layer w0.254: LED2.1@96.502,4.042 ccw(c96.426,4.237) 96.636,4.237 ; LED2.1@96.636,3.594 96.636,4.237 ; LED2.1@96.77,4.042 cw(c96.846,4.237) 96.636,4.237 ; LED2.4@98.294,6.248 cw(c98.208,6.037) 98.436,6.037 ; LED2.4@98.578,6.248 ccw(c98.664,6.037) 98.436,6.037 ; LED2.4@98.734,6.47 cw(c99.182,6.133) 99.182,6.693 ; LED2.4@98.734,6.917 ccw(c99.182,7.254) 99.182,6.693 ; R7.1@99.85,6.139 ccw(c99.557,5.991) 99.557,6.318 ; R7.1@99.85,6.498 cw(c99.557,6.646) 99.557,6.318 ; R7.1@100.33,6.318 99.557,6.318 ; 96.636,4.237 98.436,6.037 ; 98.436,6.037 LED2.4@98.436,6.693 99.182,6.693 ; 99.182,6.693 99.557,6.318
NetLED3_1: LED3.2 R21.1 | length 2.7
  Top Layer w0.254: R21.1@60.198,6.318 60.955,6.318 ; R21.1@60.682,6.146 cw(c60.955,6.015) 60.955,6.318 ; R21.1@60.682,6.491 ccw(c60.955,6.622) 60.955,6.318 ; LED3.2@62.092,6.693 61.33,6.693 60.955,6.318
NetModule6_4: Module6.5 R13.1 R13.2 | length 10
  Top Layer w0.254: Module6.5@8.305,72.288 14.829,72.288 15.102,72.015 R13.2@15.102,71.455 R13.1@15.977,71.455 ; R13.2@15.015,71.792 ccw(c14.805,72.002) 15.102,72.002 ccw(c15.399,72.002) R13.2@15.189,71.792 ; R13.2@15.189,71.368 cw(c15.399,71.158) 15.399,71.455 cw(c15.399,71.752) R13.2@15.189,71.542 ; R13.1@15.837,71.315 ccw(c15.499,70.977) 15.499,71.455 ccw(c15.499,71.933) R13.1@15.837,71.595
NSTATUS: FPGA1.82 R27.2 | length 109.5
  Top Layer w0.21: FPGA1.82@112.552,86.144 112.552,88.6
  Top Layer w0.254: 112.552,88.6 v1(113.635,89.683) ; v1(124.252,94.458) 128.545,90.165 128.545,72.652 129.358,71.839 v1(129.358,7.971)
  Bottom Layer w0.254: v1(113.635,89.683) 118.41,94.458 v1(124.252,94.458) ; 127.927,6.288 ccw(c128.463,6.288) R27.2@128.084,5.909 ; R27.2@127.997,5.572 127.927,5.642 127.927,7.971 v1(129.358,7.971)
OSC1: C32.2 IC7.63 X1.2 | length 19.7
  Top Layer w0.17: 46.229,65.756 IC7.63@46.229,70.707
  Top Layer w0.254: v1(44.547,62.352) 44.547,64.074 46.229,65.756
  Bottom Layer w0.254: C32.2@41.533,63.881 41.533,62.061 41.953,61.641 X1.2@41.953,59.846 X1.2@43.81,59.846 ; v1(44.547,62.352) 43.81,61.616 ; X1.2@43.81,59.846 43.81,61.616 ; X1.2@43.81,59.846 43.81,61.616
OSC2: C33.2 IC7.64 X1.1 | length 27.4
  Top Layer w0.17: 46.729,65.525 IC7.64@46.729,70.707
  Top Layer w0.254: v1(43.633,57.272) 45.085,58.725 45.085,61.866 45.271,62.053 45.271,62.652 45.085,62.838 45.085,63.881 46.729,65.525
  Bottom Layer w0.254: v1(43.633,57.272) 43.683,57.323 47.417,57.323 49.94,59.846 X1.1@50.953,59.846 50.953,61.743 51.179,61.969 C33.2@51.179,63.881
P28: FPGA1.28 LED1.2 LED1.3 | length 89.9
  Top Layer w0.21: 113.052,60.525 FPGA1.28@113.052,65.044
  Top Layer w0.254: LED1.2@86.095,6.694 86.095,7.463 86.4,7.768 88.184,7.768 88.743,7.209 ; LED1.3@87.895,3.594 88.413,3.594 ; LED1.3@88.249,3.475 cw(c88.413,3.421) 88.413,3.594 ; LED1.3@88.249,3.712 ccw(c88.413,3.766) 88.413,3.594 ; v1(93.01,56.612) 88.743,52.345 88.743,7.209 ; v1(108.733,59.838) 112.365,59.838 113.052,60.525 ; v1@108.886,59.685 cw(c109.254,59.316) 109.254,59.838 cw(c109.254,60.359) v1@108.886,59.991 ; 88.413,3.594 88.743,3.924 88.743,7.209
  Bottom Layer w0.254: v1(93.01,56.612) 109.081,56.612 109.177,56.708 109.177,59.393 v1(108.733,59.838) ; v1@108.733,59.622 cw(c108.733,59.1) 109.102,59.469 cw(c109.47,59.838) v1@108.949,59.838
P30: FPGA1.30 LED2.2 LED2.3 | length 89.5
  Top Layer w0.21: 113.943,59.424 113.943,63.466 114.052,63.575 FPGA1.30@114.052,65.044
  Top Layer w0.254: LED2.3@98.158,3.245 cw(c97.841,2.963) 98.141,2.662 ; LED2.3@98.306,3.144 cw(c98.237,2.957) 98.436,2.957 ; 98.331,2.853 ccw(c98.042,3.142) LED2.3@98.347,3.414 ; LED2.3@98.436,3.594 98.436,2.957 ; LED2.3@98.566,3.144 ccw(c98.635,2.957) 98.436,2.957 ; v1(107.514,10.536) 107.603,10.536 108.014,10.948 ; v1@107.52,10.752 ccw(c107.541,11.42) 108.014,10.948 ; v1@107.73,10.536 cw(c108.036,10.536) 107.819,10.753 ; 113.943,59.424 113.619,59.1 108.517,59.1 107.729,58.312 107.729,55.774 108.014,55.489 108.014,10.948 ; LED2.2@96.642,6.693 v1(96.642,8.128) LED2.2@96.642,6.693 ; LED2.2@96.642,6.693 LED2.2@96.636,6.693 96.636,5.583 95.804,4.752 95.804,2.967 96.109,2.662 98.141,2.662 ; 98.141,2.662 98.436,2.957
  Bottom Layer w0.254: v1(96.642,8.128) 96.642,7.768 ; v1(107.514,10.536) 97.887,10.536 96.642,9.292 ; v1@96.541,7.937 cw(c96.45,7.768) 96.642,7.768 ; v1@96.541,7.937 cw(c96.45,7.768) 96.642,7.768 ; v1@96.541,7.937 cw(c96.45,7.768) 96.642,7.768 ; 96.642,7.768 cw(c96.835,7.768) v1@96.744,7.937 ; 96.642,7.768 cw(c96.835,7.768) v1@96.744,7.937 ; 96.642,7.768 cw(c96.835,7.768) v1@96.744,7.937 ; 96.642,7.768 96.642,9.292 ; 96.642,7.768 96.642,9.292
P58: FPGA1.58
P104: FPGA1.104
P132: Debug4.4 FPGA1.132 IC7.10 | length 85.9
  Top Layer w0.17: v1@47.729,84.61 IC7.10@47.729,85.756
  Top Layer w0.175: v1(47.544,84.425) v1@47.729,84.61
  Top Layer w0.21: v1@95.015,72.844 FPGA1.132@97.752,72.844 ; v1@95.134,72.725 cw(c95.421,72.438) 95.421,72.844 ; v1@95.134,73.062 ccw(c95.66,73.587) 95.66,72.844
  Top Layer w0.254: v1(69.287,90.038) 69.287,73.935 v1(70.328,72.893) ; v1(94.966,72.893) v1@95.015,72.844
  Bottom Layer w0.254: v1(47.544,84.425) 47.544,86.051 44.649,88.946 43.658,88.946 43.264,88.552 42.21,88.552 41.88,88.883 41.88,90.013 42.418,90.551 Debug4.4@67.183,90.551 68.774,90.551 v1(69.287,90.038) ; v1(70.328,72.893) v1(94.966,72.893) ; v1@94.813,72.741 ccw(c94.445,72.372) 94.445,72.893 ccw(c94.445,73.415) v1@94.813,73.046
P133: Debug4.2 FPGA1.133 IC7.12 | length 87.9
  Top Layer w0.17: 46.729,76.426 IC7.12@46.729,85.756
  Top Layer w0.21: v1(94.89,71.852) 96.287,71.852 96.779,72.344 FPGA1.133@97.752,72.344 ; v1@95.058,71.684 cw(c95.464,71.277) 95.464,71.852 cw(c95.464,72.427) v1@95.058,72.02 ; 96.544,72.109 cw(c97.002,71.652) FPGA1.133@97.002,72.299
  Top Layer w0.254: 46.729,76.426 v1(47.747,75.408) ; v1(63.927,73.681) v1(63.927,92.756)
  Bottom Layer w0.254: v1(47.747,75.408) 49.475,73.681 v1(63.927,73.681) 65.756,71.852 v1(94.89,71.852) ; v1(63.927,92.756) 64.308,92.756 ; v1@64.113,92.645 cw(c64.308,92.528) 64.308,92.756 ; v1@64.113,92.867 ccw(c64.308,92.984) 64.308,92.756 ; Debug4.2@67.183,95.631 64.308,92.756
P134: Debug4.3 FPGA1.134 IC7.11 | length 83.2
  Top Layer w0.17: IC7.11@47.229,85.756 v1(47.229,91.893)
  Top Layer w0.21: FPGA1.134@97.752,71.844 98.954,71.844 v1(99.356,71.442)
  Top Layer w0.254: v1(73.782,93.091) 76.094,90.78 v1(76.094,73.63)
  Bottom Layer w0.254: v1(47.229,91.893) 65.985,91.893 Debug4.3@67.183,93.091 v1(73.782,93.091) ; v1(76.094,73.63) 95.347,73.63 95.703,73.274 95.703,72.233 97.43,70.506 98.674,70.506 99.356,71.188 v1(99.356,71.442) ; v1@76.247,73.477 cw(c76.615,73.109) 76.615,73.63 cw(c76.615,74.151) v1@76.247,73.783 ; 98.808,70.639 ccw(c98.006,71.442) v1@99.14,71.442 ; 99.241,71.073 ccw(c98.873,71.442) v1@99.394,71.442
P135: FPGA1.135 IC7.81 | length 46.5
  Top Layer w0.17: IC7.81@53.754,74.731 54.721,74.731
  Top Layer w0.175: 54.721,74.731 56.46,72.993
  Top Layer w0.21: 95.626,71.344 FPGA1.135@97.752,71.344
  Top Layer w0.254: v1(56.46,71.674) 56.46,72.993 ; v1(95.205,70.922) 95.626,71.344
  Bottom Layer w0.254: v1(56.46,71.674) 57.211,70.922 v1(95.205,70.922)
P136: FPGA1.136
P137: FPGA1.137
P139: FPGA1.139
PIC_ACCEL_INT1: Header2.5 IC7.69 | length 56.9
  Top Layer w0.17: v1@49.094,71.954 cw(c48.766,71.626) 49.229,71.626 ; IC7.69@49.229,70.707 v1@49.229,72.089 ; IC7.69@49.229,71.4 cw(c50.012,71.4) v1@49.458,71.954
  Top Layer w0.175: v1@49.229,72.089 v1(49.276,72.136)
  Bottom Layer w0.254: v1(49.276,72.136) 49.276,72 49.229,71.954 52.563,68.62 59.65,68.62 60.579,67.691 60.579,65.164 59.69,64.275 59.69,55.474 50.546,46.33 Header2.5@50.546,31.496 ; v1@49.492,72.136 ccw(c50.567,72.136) 49.807,71.376
PIC_ACCEL_INT2: Header2.4 IC7.68 | length 45.9
  Top Layer w0.17: 48.729,69.642 IC7.68@48.729,70.707
  Top Layer w0.175: 48.729,69.642 48.903,69.469 48.903,66.945
  Top Layer w0.254: 48.903,66.945 49.304,66.543 49.304,49.467 v1(49.754,49.017) ; v1@49.538,49.017 ccw(c49.017,49.017) 49.385,49.386 ccw(c49.754,49.755) v1@49.754,49.233
  Bottom Layer w0.254: v1(49.754,49.017) 49.449,48.713 49.449,30.577 49.881,30.145 51.735,30.145 Header2.4@53.086,31.496
PIC_GYRO_/CS: Header1.19 IC7.82 | length 106.5
  Top Layer w0.17: IC7.82@53.754,75.231 54.884,75.231
  Top Layer w0.175: 54.884,75.231 57.78,72.335
  Top Layer w0.254: v1(54.809,65.172) 55.875,65.172 57.78,67.077 57.78,72.335
  Bottom Layer w0.254: Header1.19@1.651,14.732 0.707,15.676 0.707,35.428 6.676,41.397 10.308,41.397 11.275,40.43 33.572,40.43 51.151,58.009 54.37,58.009 54.809,58.448 v1(54.809,65.172)
PIC_GYRO_DRDY: Header1.15 IC7.83 | length 94.2
  Top Layer w0.17: IC7.83@53.754,75.731 55.046,75.731
  Top Layer w0.175: 55.046,75.731 58.288,72.489
  Top Layer w0.254: v1(50.719,56.46) 58.288,64.029 58.288,72.489
  Bottom Layer w0.254: Header1.15@1.651,24.892 7.008,30.249 7.008,36.482 7.224,36.698 7.224,39.685 8.073,40.534 9.8,40.534 10.71,39.624 33.884,39.624 v1(50.719,56.46) ; v1@50.503,56.46 cw(c49.982,56.46) 50.35,56.091 cw(c50.719,55.722) v1@50.719,56.244
PIC_GYRO_INT1: Header1.23 IC7.84 | length 112.1
  Top Layer w0.17: IC7.84@53.754,76.231 55.331,76.231
  Top Layer w0.254: 55.331,76.231 59.182,72.381 v1(59.182,67.826)
  Bottom Layer w0.254: Header1.23@1.651,4.572 10.16,13.081 10.16,36.068 12.827,38.735 34.29,38.735 53.056,57.501 54.58,57.501 59.182,62.103 v1(59.182,67.826)
PIC_SRAM_/CS: IC4.1 IC7.78 | length 63.3
  Top Layer w0.17: IC7.78@53.754,73.231 54.928,73.231
  Top Layer w0.175: 54.928,73.231 55.728,72.431
  Top Layer w0.254: IC4.1@11.681,56.231 12.391,56.231 ; 12.445,56.177 ccw(c12.743,56.474) v1@12.743,56.053 ; v1@12.527,55.856 ccw(c12.056,55.896) 12.391,56.231 ; v1(12.743,55.837) 12.7,55.88 12.7,55.922 12.391,56.231 ; 55.728,72.431 55.728,68.235 v1(56.442,67.521)
  Bottom Layer w0.254: v1(12.743,55.837) 12.7,55.88 v1@12.7,55.922 ; v1@56.226,67.521 ccw(c55.704,67.521) 56.073,67.89 ccw(c56.442,68.259) v1@56.442,67.737 ; v1(56.442,67.521) 55.934,68.029 50.275,68.029 47.595,65.35 40.204,65.35 29.053,54.199 14.423,54.199 ; v1@12.7,55.922 14.423,54.199 ; v1@12.7,55.922 14.423,54.199
PIC_SRAM_/WP: IC4.3 IC7.58 | length 44.3
  Top Layer w0.17: IC7.58@43.701,70.028 cw(c43.474,69.801) 43.795,69.801 ; 43.795,69.11 IC7.58@43.795,70.42
  Top Layer w0.254: IC4.3@11.681,58.771 13.737,58.771 16.861,61.895 v1(16.861,68.677) ; v1(37.664,68.677) 39.188,67.153 43.671,67.153 43.876,67.359 43.876,69.029 43.795,69.11
  Bottom Layer w0.254: v1(16.861,68.677) v1(37.664,68.677)
PIC_UART1_/CTS: IC7.47 Module4.16 | length 78.7
  Top Layer w0.17: v1@37.015,73.484 cw(c37.611,72.887) 37.611,73.731 ; v1@37.135,73.364 cw(c38.022,72.477) IC7.47@38.022,73.731 ; v1@37.137,73.731 IC7.47@38.704,73.731
  Top Layer w0.254: v1(36.952,73.546) v1@37.137,73.731
  Bottom Layer w0.254: v1(36.952,73.546) 36.952,76.704 36.165,77.491 33.092,77.491 32.253,78.329 32.253,79.345 32.761,79.853 34.438,79.853 35.492,80.907 35.492,88.832 40.894,94.234 44.958,94.234 47.752,97.028 47.752,122.885 50.922,126.056 50.922,131.727 Module4.16@52.462,133.267
PIC_UART1_/RTS: IC7.48 Module4.12 | length 67.6
  Top Layer w0.17: IC7.48@38.704,73.231 39.957,73.231
  Top Layer w0.175: 39.957,73.231 41.321,74.595
  Top Layer w0.254: 41.321,74.595 41.321,83.815 ; v1@41.39,84.049 cw(c41.142,83.995) 41.321,83.815 ; v1@41.554,83.884 ccw(c41.5,83.636) 41.321,83.815 ; v1(41.601,84.095) 41.321,83.815
  Bottom Layer w0.254: 40.927,85.201 cw(c39.821,84.095) v1@41.385,84.095 ; 41.36,84.767 cw(c40.688,84.095) v1@41.639,84.095 ; v1@41.471,84.268 ccw(c41.277,84.527) 41.601,84.527 ; v1(41.601,84.095) 41.601,84.527 ; v1@41.73,84.268 cw(c41.924,84.527) 41.601,84.527 ; Module4.12@52.462,125.267 48.357,121.162 48.357,94.661 47.341,93.645 41.042,93.645 38.756,91.359 38.756,87.371 41.601,84.527
PIC_UART1_RX: Debug3.2 IC7.52 Module4.2 | length 130.3
  Top Layer w0.17: 40.729,69.617 IC7.52@40.729,70.707
  Top Layer w0.175: 36.047,69.617 40.729,69.617
  Top Layer w0.254: v1(24.151,82.596) 24.151,81.259 35.793,69.617 36.047,69.617
  Bottom Layer w0.254: v1(24.151,82.596) 35.149,93.594 35.149,96.134 34.89,96.393 33.02,96.393 32.507,96.906 32.507,99.665 45.466,112.624 45.466,115.443 44.069,116.84 ; Module4.2@30.462,139.267 29.51,140.219 29.51,141.981 29.815,142.286 39.848,142.286 49.856,132.279 49.856,127.097 41.275,118.516 ; 41.275,118.516 Debug3.2@41.275,114.046 41.275,118.516 ; 44.069,116.84 41.275,116.84 44.069,116.84
PIC_UART1_TX: Debug3.3 IC7.53 Module4.3 | length 78.9
  Top Layer w0.17: v1@41.037,71.822 cw(c40.573,71.358) IC7.53@41.229,71.358 ; IC7.53@41.229,70.707 v1@41.229,71.995 ; IC7.53@41.229,71.405 cw(c41.819,71.405) v1@41.402,71.822
  Top Layer w0.175: v1(41.22,72.004) v1@41.229,71.995
  Top Layer w0.254: v1(32.228,137.267) 33.168,136.327 33.168,129.681 32.939,129.452 32.939,116.48 v1(35.373,114.046) ; v1@40.432,75.154 ccw(c40.063,75.523) 40.585,75.523 ccw(c41.106,75.523) v1@40.737,75.154 ; v1(40.585,75.002) 40.585,79.218 39.873,79.929 39.873,84.679 39.492,85.06 39.492,87.778 42.007,90.292 42.007,110.765 v1(41.499,111.273)
  Bottom Layer w0.254: Module4.3@30.462,137.267 v1(32.228,137.267) ; v1(35.373,114.046) Debug3.3@38.735,114.046 41.499,111.282 v1(41.499,111.273) ; v1@40.432,74.849 cw(c40.063,74.48) 40.585,74.48 cw(c41.106,74.48) v1@40.737,74.849 ; v1(40.585,75.002) 40.585,72.639 v1(41.22,72.004)
SOSCI: C34.2 IC7.73 X2.1 | length 12.8
  Top Layer w0.17: 51.229,66.397 IC7.73@51.229,70.707
  Top Layer w0.254: C34.2@50.446,64.585 ccw(c49.596,65.435) 50.798,65.435 ccw(c52.001,65.435) C34.2@51.15,64.585 ; C34.2@50.798,64.007 C34.2@50.798,64.029 ; 51.229,66.397 50.798,65.966 C34.2@50.798,64.029 ; X2.1@52.803,64.021 X2.1@52.796,64.029 ; C34.2@50.798,64.029 X2.1@52.796,64.029 ; C34.2@50.798,64.029 X2.1@52.796,64.029
SOSCO: C35.2 IC7.74 X2.2 | length 12.2
  Top Layer w0.17: 51.729,66.961 IC7.74@51.729,70.707
  Top Layer w0.254: C35.2@50.798,61.213 51.606,62.021 X2.2@52.803,62.021 53.742,62.96 53.742,64.948 51.729,66.961
SYS: C36.1 C37.1 C38.2 C43.1 C49.2 D1.K D3.K R19.2 REG2.1 REG4.1 | length 67.3
  Bottom Layer w0.254: REG4.1@112.502,133.985 REG4.1@112.502,134.35 ; 143.48,126.386 143.487,126.379
  Bottom Layer w1: C49.2@113.896,130.967 115.567,130.967 ; REG2.1@125.73,134.366 127.281,132.815 C43.1@127.281,130.967 127.281,129.263 R19.2@130.276,126.268 122.779,126.268 121.793,127.254 119.38,127.254 115.567,131.067 115.567,132.429 114.011,133.985 ; 114.011,133.985 112.502,133.985 114.011,133.985
  Bottom Layer w1.25: R19.2@130.276,126.268 132.295,128.287 C38.2@134.017,128.287 134.923,127.381 139.749,127.381 C36.1@140.744,126.386 143.48,126.386 ; 143.487,126.379 C37.1@146.274,126.379
  Bottom Layer w1.37: C37.1@146.274,126.379 147.81,127.915 D3.K@147.81,133.634 D1.K@147.81,140.111
SYSPOWMONITOR: D2.K IC7.23 R19.1 R20.2 | length 127.7
  Top Layer w0.17: IC7.23@41.229,85.756 41.229,88.219
  Top Layer w0.254: 41.229,88.219 43.561,90.551 43.561,96.901 45.212,98.552 47.117,98.552 52.705,104.14 v1(54.991,104.14) ; v1(59.436,104.14) 68.326,113.03 86.436,113.03 95.61,122.204 v1@96.804,122.204 ; R19.1@118.076,126.268 R20.2@118.076,122.204 118.076,121.859 D2.K@121.541,118.394
  Bottom Layer w0.254: v1(54.991,104.14) v1(59.436,104.14) ; v1@96.804,122.204 R20.2@118.076,122.204 v1@96.804,122.204
  other v1: 96.82,122.22
TCK: BB.1 FPGA1.12 R30.4 | length 106.2
  Top Layer w0.21: 105.052,3.397 FPGA1.12@105.052,65.044 105.052,75.05
  Top Layer w0.254: v1(103.653,76.449) 105.052,75.05 ; 105.052,3.397 v1(105.559,2.89) ; v1@105.343,2.89 ccw(c104.821,2.89) 105.19,3.259 ccw(c105.559,3.628) v1@105.559,3.106
  Bottom Layer w0.254: R30.4@103.36,97.11 cw(c103.022,96.772) 103.5,96.772 cw(c103.978,96.772) R30.4@103.64,97.11 ; R30.4@103.5,97.425 103.5,96.718 103.144,96.718 101.646,95.22 101.646,85.746 102.205,85.187 103.399,85.187 103.653,84.933 103.653,83.582 104.095,83.14 104.095,80.102 103.653,79.66 v1(103.653,76.449) ; v1(105.559,2.89) 106.556,1.892 BB.1@111.579,1.892
TDI: BB.9 FPGA1.13 R27.4 | length 108.8
  Top Layer w0.21: 105.552,61.368 FPGA1.13@105.552,65.044
  Top Layer w0.254: v1@105.604,61.167 ccw(c105.407,61.223) 105.552,61.368 ; v1@105.753,61.316 cw(c105.697,61.512) 105.552,61.368 ; v1(105.812,61.108) 105.552,61.368 ; v1(108.453,57.958) 108.606,58.111 115.293,58.111 122.845,65.662 124.676,65.662 127.735,62.603 v1@127.735,9.212 ; v1(124.608,3.247) 127.3,5.939 127.3,8.733 v1(127.757,9.19) ; v1@127.541,9.19 cw(c127.02,9.19) 127.389,8.821 cw(c127.757,8.453) v1@127.757,8.974
  Bottom Layer w0.254: v1(105.812,61.108) 108.453,58.466 ; v1@108.304,58.114 ccw(c107.964,58.466) 108.453,58.466 ; v1(108.453,57.958) 108.453,58.466 ; v1@108.603,58.114 cw(c108.943,58.466) 108.453,58.466 ; BB.9@121.739,1.892 123.093,3.247 v1(124.608,3.247) ; v1@127.735,9.212 v1(127.757,9.19) 129.637,9.19 130.094,8.733 130.094,5.66 ; R27.4@129.532,5.887 ccw(c128.175,7.244) 130.094,7.244 ; R27.4@129.712,5.707 ccw(c128.788,6.631) 130.094,6.631 ; R27.4@129.891,5.528 ccw(c129.401,6.018) 130.094,6.018 ; R27.4@129.672,5.66 130.094,5.66 ; R27.4@129.672,5.66 130.094,5.66 ; R27.4@129.672,5.66 R27.4@129.672,5.572 130.094,5.66 ; 130.094,5.66 cw(c130.094,5.917) 129.856,5.821 ccw(c130.094,5.917) 130.094,5.66
TDO: BB.3 FPGA1.10 | length 93.9
  Top Layer w0.21: 104.052,29.132 FPGA1.10@104.052,65.044
  Top Layer w0.254: v1(89.403,3.348) 89.403,14.483 104.052,29.132
  Bottom Layer w0.254: v1(89.403,3.348) 90,3.945 92.845,3.945 93.62,3.17 104.391,3.17 104.835,3.614 106.283,3.614 106.726,3.17 112.841,3.17 BB.3@114.119,1.892
TMS: BB.5 FPGA1.11 R27.3 | length 112.2
  Top Layer w0.21: 104.552,27.4 FPGA1.11@104.552,65.044
  Top Layer w0.254: v1(92.401,3.221) 92.401,15.248 104.552,27.4 ; v1(124.608,0.808) 128.799,4.999 128.799,7.091 v1(128.651,7.239)
  Bottom Layer w0.254: v1(92.401,3.221) 94.814,0.808 115.574,0.808 BB.5@116.659,1.892 117.743,0.808 v1(124.608,0.808) ; v1@128.498,7.086 cw(c128.13,6.718) 128.651,6.718 cw(c129.172,6.718) v1@128.804,7.086 ; v1(128.651,7.239) 128.651,6.696 128.799,6.549 128.797,6.547 R27.3@128.797,5.572 ; R27.3@128.71,5.909 ccw(c128.5,6.119) 128.797,6.119 ccw(c129.094,6.119) R27.3@128.884,5.909
USB_PIC_N: IC7.56 Module6.4 | length 42.7
  Top Layer w0.17: 42.729,69.577 IC7.56@42.729,70.707
  Top Layer w0.175: v1(42.418,69.266) 42.729,69.577 ; v1@42.485,69.512 ccw(c42.551,69.755) 42.729,69.577 ; v1@42.665,69.333 cw(c42.907,69.399) 42.729,69.577
  Top Layer w0.254: Module6.4@8.305,71.488 9.757,71.488 9.744,71.501 v1(11.938,71.501) ; Module6.4@9.392,71.401 cw(c9.602,71.191) 9.602,71.488 cw(c9.602,71.785) Module6.4@9.392,71.575 ; v1@11.785,71.348 ccw(c11.417,70.98) 11.417,71.501 ccw(c11.417,72.022) v1@11.785,71.654
  Bottom Layer w0.254: v1(11.938,71.501) 11.938,69.171 13.761,67.348 41.313,67.348 42.011,68.046 42.011,68.859 v1(42.418,69.266) ; v1@42.202,69.266 cw(c41.681,69.266) 42.049,68.897 cw(c42.418,68.528) v1@42.418,69.05
USB_PIC_P: IC7.57 Module6.3 | length 46.7
  Top Layer w0.17: 43.229,69.003 IC7.57@43.229,70.707
  Top Layer w0.254: v1(42.819,67.97) 43.229,68.381 43.229,69.003 ; v1@42.819,68.186 ccw(c42.819,68.707) 43.187,68.339 ccw(c43.556,67.97) v1@43.035,67.97 ; 9.602,70.688 ccw(c9.602,70.391) 9.392,70.601 cw(c9.602,70.391) 9.602,70.688 ; 9.602,70.688 cw(c9.602,70.985) 9.392,70.775 ccw(c9.602,70.985) 9.602,70.688 ; Module6.3@8.305,70.688 11.176,70.688 Module6.3@8.305,70.688 ; 10.531,70.688 ccw(c10.531,71.384) 11.023,70.892 cw(c10.531,71.384) 10.531,70.688 ; 10.778,70.688 cw(c10.778,70.341) 11.023,70.586 ccw(c10.778,70.341) 10.778,70.688
  Bottom Layer w0.254: v1(11.176,70.739) 11.176,69.215 13.551,66.84 41.689,66.84 v1(42.819,67.97)
USD_/CS: IC7.77 Module3.2 | length 68.1
  Top Layer w0.17: 52.675,72.478 52.929,72.732 IC7.77@53.754,72.732 ; 52.737,72.539 cw(c53.104,72.172) IC7.77@53.104,72.692
  Top Layer w0.175: 52.675,67.153 52.675,72.478
  Top Layer w0.254: Module3.2@10.239,41.398 v1(11.934,41.398) ; 52.675,67.153 v1(53.73,66.098) ; v1@53.514,66.098 ccw(c52.993,66.098) 53.362,66.466 ccw(c53.73,66.835) v1@53.73,66.314
  Bottom Layer w0.254: v1(11.934,41.398) 33.651,41.398 50.77,58.517 54.159,58.517 54.283,58.641 54.283,64.529 53.73,65.082 v1(53.73,66.098)
VBUS: IC7.54 R13.7 | length 31.5
  Top Layer w0.17: 41.729,69.466 IC7.54@41.729,70.707
  Top Layer w0.175: v1(41.245,68.982) 41.729,69.466 ; v1@41.245,69.237 ccw(c41.245,69.854) 41.681,69.418 ccw(c42.117,68.982) v1@41.5,68.982
  Top Layer w0.254: v1(14.697,68.072) 15.113,68.488 R13.7@15.113,69.444
  Bottom Layer w0.254: v1(14.697,68.072) 14.824,67.945 40.208,67.945 v1(41.245,68.982)
XBEE_/DTR: IC7.92 Module4.9 | length 64.3
  Top Layer w0.17: IC7.92@53.754,80.232 55.289,80.232
  Top Layer w0.175: 55.289,80.232 57.226,82.169
  Top Layer w0.254: v1(33.676,126.462) 37.562,126.462 57.226,106.798 57.226,82.169
  Bottom Layer w0.254: Module4.9@30.462,125.267 31.657,126.462 v1(33.676,126.462)
XBEE_/RESET: IC7.28 Module4.5 | length 59.2
  Top Layer w0.17: 37.638,83.232 IC7.28@38.704,83.232
  Top Layer w0.175: 37.638,83.232 37.638,84.778 37.916,85.056
  Top Layer w0.254: v1@32.278,133.114 cw(c31.91,132.746) 32.431,132.746 cw(c32.953,132.746) v1@32.584,133.114 ; v1(32.431,133.267) 32.431,115.27 41.499,106.202 41.499,90.813 37.916,87.23 37.916,85.056
  Bottom Layer w0.254: Module4.5@30.462,133.267 v1(32.431,133.267)
XBEE_ASSOCIATE: IC7.91 Module4.15 | length 57.3
  Top Layer w0.17: IC7.91@53.754,79.731 56.889,79.731
  Top Layer w0.254: 56.889,79.731 57.806,80.648 v1(57.806,125.923)
  Bottom Layer w0.254: Module4.15@52.462,131.267 v1(57.806,125.923)
pads on no net: "Header 8.6" BB.6 BB.7 BB.8 FPGA1.18 FPGA1.22 FPGA1.76 FPGA1.88 FPGA1.89 FPGA1.90 H1.NC Header1.3 Header1.4 Header1.5 Header1.6 Header1.7 Header1.8 Header1.9 Header1.10 Header1.11 Header1.12 Header1.14 Header1.16 Header1.17 Header1.18 Header1.24 Header7.12 Header7.18 Header7.20 Header7.22 Header7.24 IC2.3 IC6.3 IC6.5 IC6.6 IC6.7 IC6.14 IC7.1 IC7.6 IC7.7 IC7.8 IC7.14 IC7.20 IC7.21 IC7.22 IC7.26 IC7.27 IC7.32 IC7.33 IC7.34 IC7.35 IC7.41 IC7.42 IC7.43 IC7.44 IC7.51 IC7.71 IC7.79 IC7.80 IC7.89 IC7.90 IC7.95 IC7.96 IC7.97 LED3.3 LED3.4 Module1.NC Module2.2 Module2.11 Module2.12 Module2.16 Module2.19 Module2.20 Module3.1 Module3.8 Module3.SHLD Module4.4 Module4.6 Module4.7 Module4.8 Module4.11 Module4.13 Module4.14 Module4.17 Module4.18 Module4.19 Module4.20 Module5.3 Module6.2 Module6.NC R5.4 R5.5 R13.3 R13.4 R13.5 R13.6 REG1.6 X2.NC

## Polygon pours and split planes (outlines as drawn)
no net on Top Layer "Socket Keepout" (solid, pour order 9): 141.605,113.03 146.685,113.03 146.685,62.23 141.605,62.23
no net on Top Layer "Socket Keepout" (solid, pour order 11): 77.47,128.494 77.47,131.445 78.105,132.08 86.995,132.08 87.63,131.445 88.011,131.064 88.011,128.494
no net on Top Layer "Socket Keepout" (solid, pour order 13): 80.518,125.73 84.836,125.73 85.274,125.292 85.274,124.557 85.274,123.755 85.09,123.571 84.582,123.063 84.582,122.682 81.026,122.682 80.899,122.809 80.645,123.063 80.645,123.19 80.645,124.079 80.391,124.333 80.391,124.968
no net on Top Layer "Socket Keepout" (solid, pour order 15): 37.465,115.316 45.085,115.316 45.085,112.776 37.465,112.776
no net on Top Layer "Socket Keepout" (solid, pour order 17): 16.129,116.586 23.749,116.586 23.749,114.046 16.129,114.046
no net on Top Layer "Socket Keepout" (solid, pour order 19): 12.065,116.586 4.445,116.586 4.445,114.046 12.065,114.046
no net on Top Layer "Socket Keepout" (solid, pour order 21): 1.27,118.11 5.08,118.11 5.08,145.923 1.27,145.923